# Altium PCB Webbie-V3.3.PcbDoc (part 1 of 3)
Units mil, origin at the board's own origin, x right, y up, seen from the top; angles counter-clockwise.
Board outline 3937.01 x 1574.8 mil, 4 copper layers (Top Layer, GND, GND-POWER, Bottom Layer), stack 61.865 mil thick; 129 components, 99 nets, 520 pads, 260 vias.
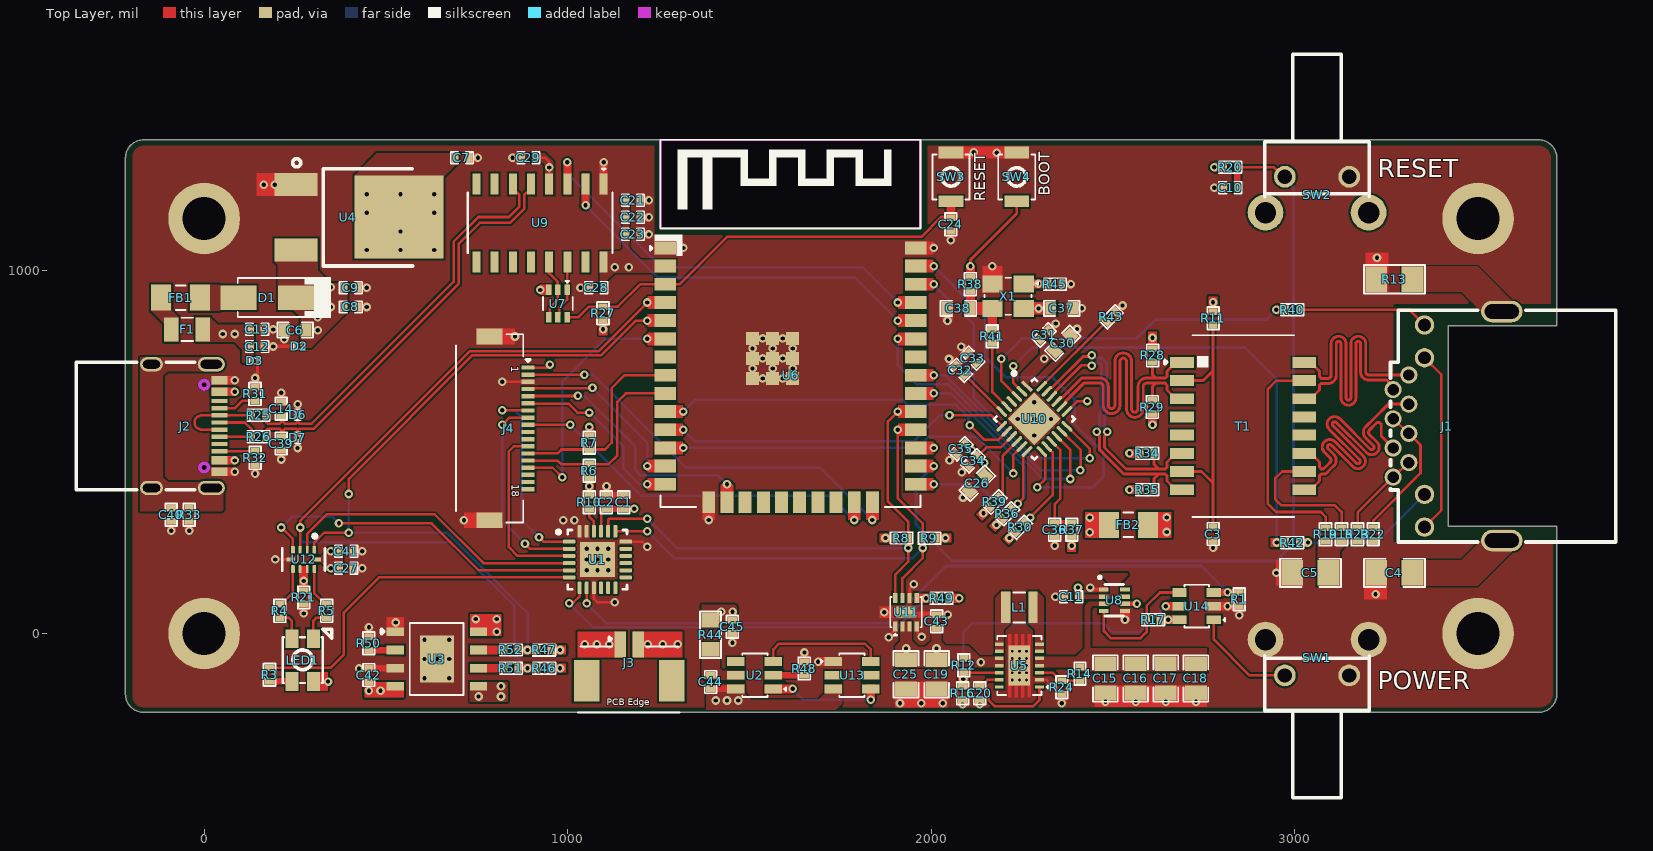
[diagram p0: Top Layer view]
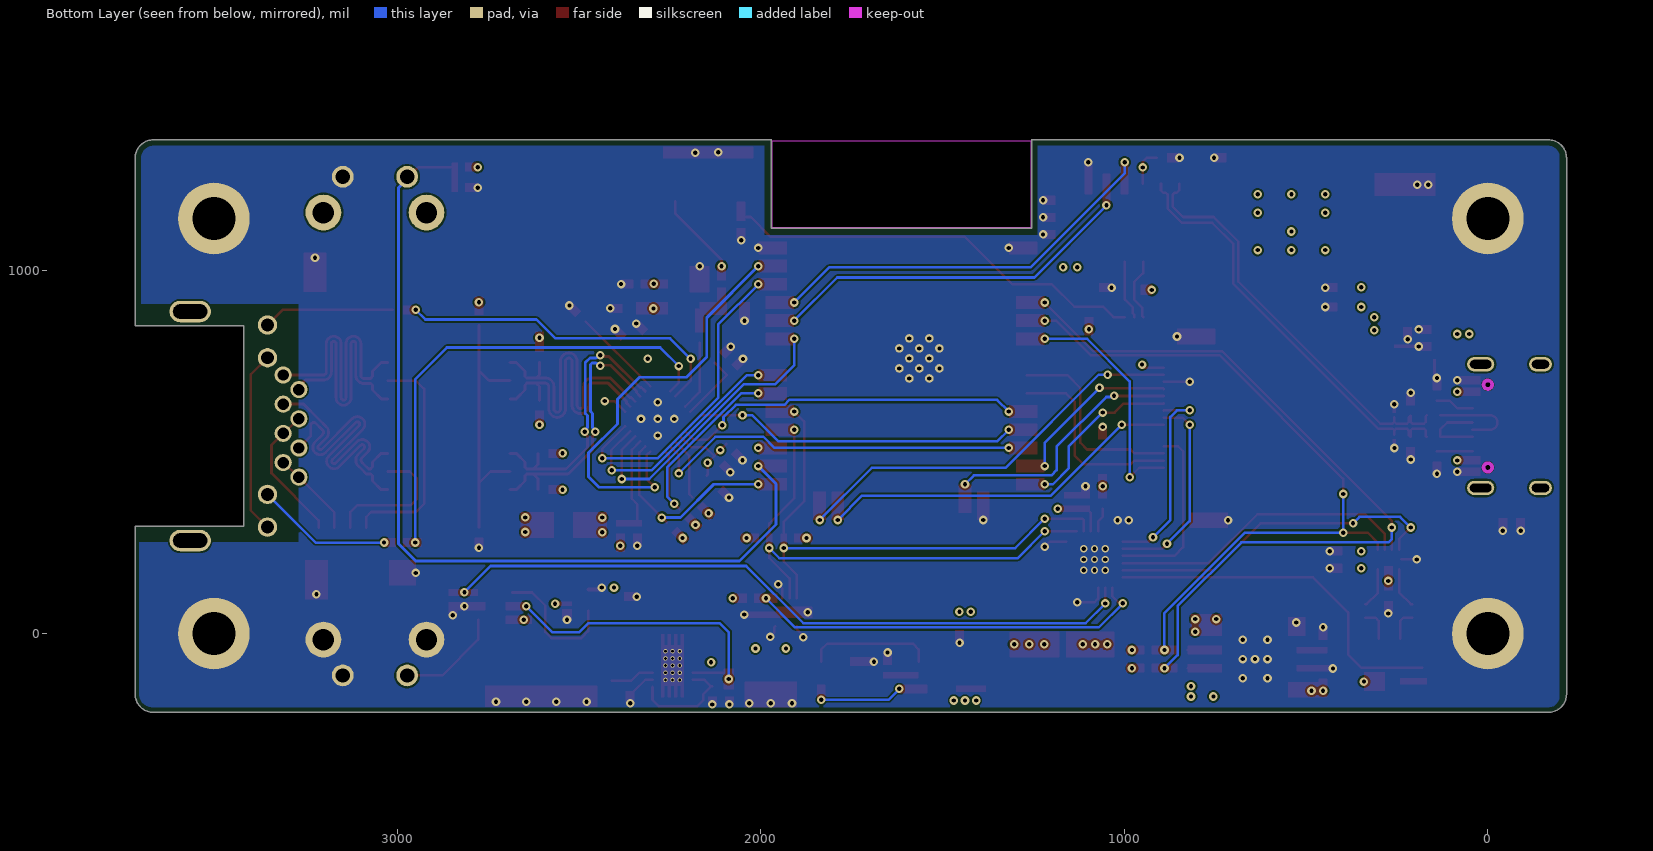
[diagram p1: Bottom Layer view, seen from below]
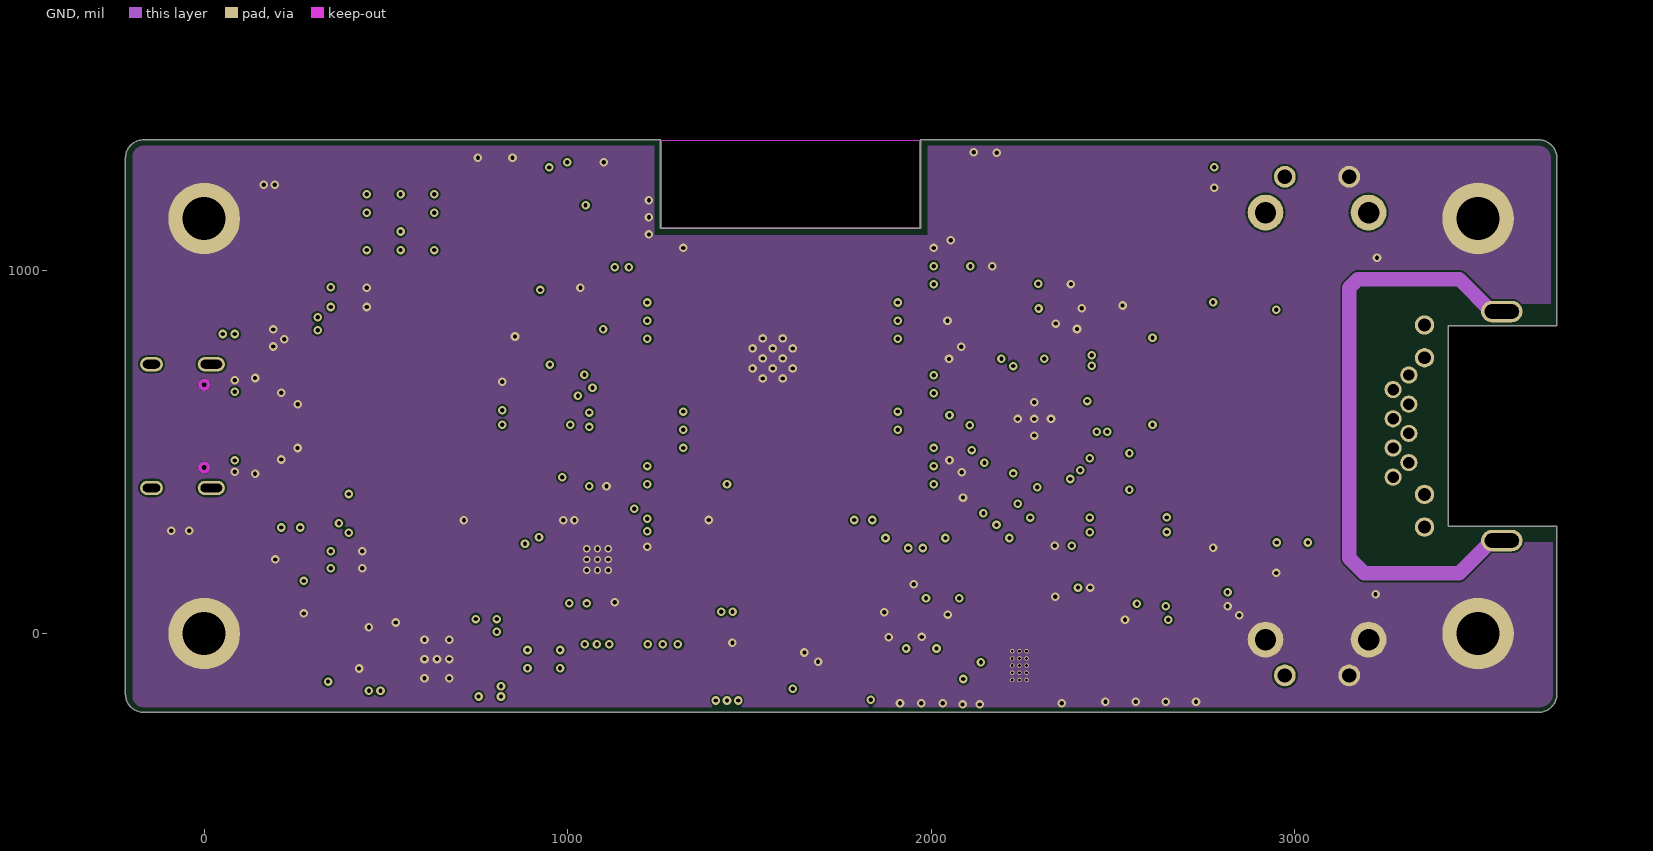
[diagram p2: GND]
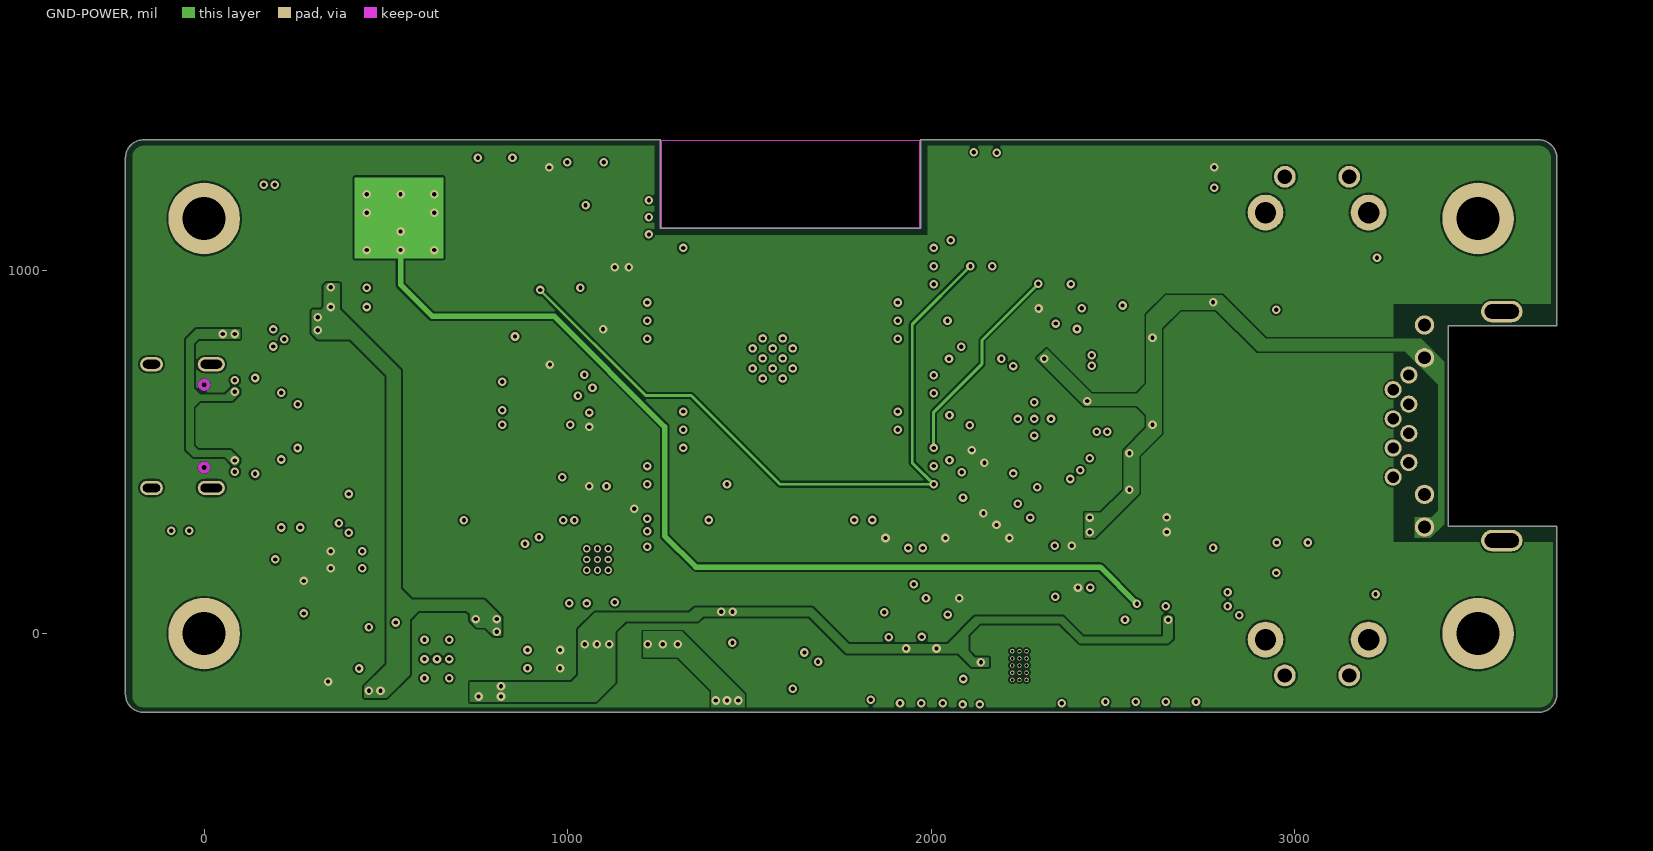
[diagram p3: GND-POWER]
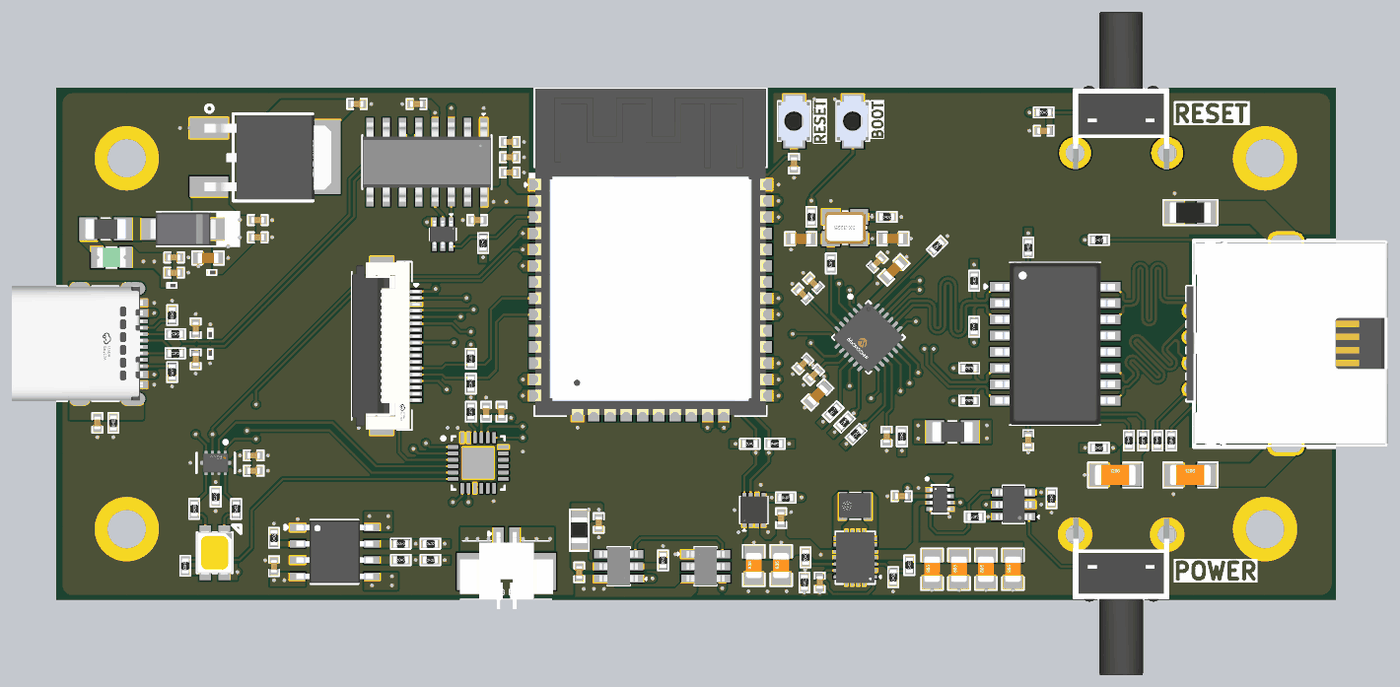
[diagram p5: 3D render of the assembled board from above, using the file's embedded part models]

## Layer stack, top to bottom
Top Solder: solder mask 0.787, Solder Resist, Dk 3.5
Top Layer: signal copper 1.378
Dielectric 2: prepreg 7.9921, PP-006, Dk 4.1
GND: signal copper 0.598
Dielectric 1: dielectric 41.9291, FR-4, Dk 4.8
GND-POWER: signal copper 0.598
Dielectric 3: prepreg 7.9921, PP-006, Dk 4.1
Bottom Layer: signal copper 1.378
Bottom Solder: solder mask 0.787, Solder Resist, Dk 3.5

## Board outline
-166.39,-216.54 cw(c-166.39,-166.39) -216.53,-166.39 -216.53,1308.27 cw(c-166.53,1308.27) -166.53,1358.27 -123.85,1358.27 1254.67,1358.27 1254.71,1358.23 1254.71,1114.53 1970.72,1114.53 1970.72,1358.23 1970.76,1358.27 3670.46,1358.27 cw(c3670.46,1308.27) 3720.46,1308.27 3720.46,1283.46 3720.47,847.15 3719.77,846.45 3421.74,846.45 3421.74,295.27 3719.77,295.27 3720.47,294.57 3720.47,-166.57 cw(c3670.51,-166.57) 3670.51,-216.53

## Design rules (kind name [scope] priority, off if disabled: settings)
Clearance [All] p1: gap=5 ignorepadtopadclearanceinfootprint=TRUE except(0: Arc-Text Track-Text SMDPad-Text THPad-Text Via-Text Fill-Text Poly-Text Region-Text Text-Text Text-Hole; 7: Arc-Hole Track-Hole Via-Hole)
DiffPairsRouting [All] p1: maxlimit=10 minlimit=6 mostfreqgap=10 toplayer_maxgap=6 toplayer_prefgap=6 toplayer_minwidth=8 toplayer_maxwidth=8 toplayer_prefwidth=8 midlayer1_mingap=10 midlayer1_minwidth=15 midlayer1_maxwidth=15 midlayer1_prefwidth=15 midlayer2_mingap=10 midlayer2_minwidth=15 midlayer2_maxwidth=15 midlayer2_prefwidth=15 bottomlayer_maxgap=6 bottomlayer_prefgap=6 bottomlayer_minwidth=8 bottomlayer_maxwidth=8 bottomlayer_prefwidth=8 maxuncoupledlength=500
HoleSize [All] p1: absolutevalues=TRUE maxlimit=500 minlimit=1 maxpercent=80.000 minpercent=20.000
HoleToHoleClearance [All] p1: gap=7 allowstackedmicrovias=TRUE
MatchedLengths Ethernet_Mag_RJ45 [InNetClass('Ethernet_Mag')] p1: tolerance=20 checknetsindiffpair=FALSE checkdiffpairvsdiffpair=TRUE checkxsignals=TRUE checkothers=TRUE
MatchedLengths USB_90 [InNetClass('USB 90 OHM')] p2: tolerance=50 checknetsindiffpair=FALSE checkdiffpairvsdiffpair=TRUE checkxsignals=TRUE checkothers=TRUE
MatchedLengths Ethernet [InNetClass('Ethernet')] p3: tolerance=20 checknetsindiffpair=FALSE checkdiffpairvsdiffpair=TRUE checkxsignals=TRUE checkothers=TRUE
MaxMinImpedance "Schematic Impedance Constraint_2" [InNetClass('Ethernet_Mag')] p1: minimum=97.00 maximum=105.0
MaxMinImpedance "Schematic Impedance Constraint_1" [InNetClass('USB 90 OHM')] p2: minimum=85.00 maximum=95.00
MaxMinImpedance "Schematic Impedance Constraint" [InNetClass('Ethernet')] p3: minimum=97.00 maximum=105.0
MinimumSolderMaskSliver [All] p1: minsoldermaskwidth=0
PlaneClearance [All] p1: clearance=10
PlaneConnect [All] p1: planeconnectstyle=Direct reliefexpansion=20 reliefentries=4 reliefconductorwidth=10 reliefairgap=10
PolygonConnect [All] p1: connectstyle=Direct reliefconductorwidth=10 reliefentries=4 polygonreliefangle="90 Angle" airgapwidth=10
RoutingVias [All] p1: holewidth=11.81 width=23.62 viastyle="Through Hole" minholewidth=11.81 minwidth=23.62 maxholewidth=11.81 maxwidth=23.62
SilkToSilkClearance [All] p1: silktosilkclearance=0
SilkToSolderMaskClearance [IsPad] p1: minsilkscreentomaskgap=0 clearancetoexposedcopper=TRUE
SolderMaskExpansion [All] p1: expansion=4 istentingtop=FALSE
SupplyNets "Schematic Supply Nets_12" [InNet('+3V3_USB')] p1: voltage=0.000
SupplyNets "Schematic Supply Nets_11" [InNet('3.3V_ESP')] p2: voltage=0.000
SupplyNets "Schematic Supply Nets_10" [InNet('+3V3_BATT')] p3: voltage=0.000
SupplyNets "Schematic Supply Nets_6" [InNet('+5V_OUT')] p4: voltage=0.000
SupplyNets "Schematic Supply Nets_5" [InNet('AVDD')] p5: voltage=0.000
SupplyNets "Schematic Supply Nets_4" [InNet('B-')] p6: voltage=0.000
SupplyNets "Schematic Supply Nets_3" [InNet('OUT/BATT+')] p7: voltage=0.000
SupplyNets "Schematic Supply Nets_2" [InNet('GND')] p8: voltage=0.000
SupplyNets "Schematic Supply Nets_1" [InNet('VUSB')] p9: voltage=0.000
UnRoutedNet [All] p1: checkbadconnections=TRUE
Width [All] p1: maxlimit=50 minlimit=5 preferedwidth=7
21 further rules are at their usual default settings.

## Classes and differential pairs
differential pair class Ethernet_Mag_RJ45: MRX MTX
net class Ethernet_Mag: MRX_N MRX_P MTX_N MTX_P
component class U_USB_Sheet: C6 C12 C13 C14 C39 C40 D1 D2 D3 F1 FB1 J2 R25 R26 R31 R32 R33
component class U_Power_Sheet: C7 C8 C9 C11 C15 C16 C17 C18 C19 C20 C25 C27 C41 L1 LED1 R1 R3 R4 R5 R12 R14 R16 R17 R21 R24 SW1 U4 U5 U8 U12 U14
component class U_FuelGauge_Sheet: C43 R49 U11
component class U_Ethernet_Sheet: C3 C4 C5 C26 C30 C31 C32 C33 C34 C35 C36 C37 C38 FB2 J1 R11 R13 R15 R19 R22 R23 R28 R29 R34 R35 R36 R37 R38 R39 R40 R41 R42 R43 R45 T1 U10 X1
component class U_Display_Sheet: J4
component class U_Controller_Sheet: C1 C2 C10 C21 C22 C23 C24 C28 C29 D6 D7 R6 R7 R8 R9 R10 R20 R27 R30 SW2 SW3 SW4 U1 U6 U7 U9
component class U_BattCharging_Sheet: C42 C44 C45 J3 R44 R46 R47 R48 R50 R51 R52 U2 U3 U13
differential pair class Ethernet_Lines: RX TX
net class Ethernet: RX_N RX_P TX_N TX_P
differential pair class USB_Lines: USB
net class "USB 90 OHM": USB_N USB_P
differential pair MTX: +MTX_P -MTX_N
differential pair MRX: +MRX_P -MRX_N
differential pair USB: +USB_P -USB_N
differential pair TX: +TX_P -TX_N
differential pair RX: +RX_P -RX_N

## Components (designator, comment, footprint, x,y, rotation, side; value= is the part's Value field where it differs from the comment)
C1 "10nF" Cap-0402 1153.54,361.59 r90 top
C2 "100nF" cap-0402 1106.53,361.6 r90 top
C3 "4.7nF" Cap-0402 2775,274 r90 top
C4 "4.7nF" Cap-1206 3274,166.9 r0 top
C5 "1000pF" Cap-1206 3042.96,166.9 r0 top
C6 "10uF" Cap-0603 250.4,834.8 r0 top
C7 "1uF" Cap-0402 709,1309 r180 top
C8 "1uF" Cap-0402 403.62,898.46 r180 top
C9 "100nF" cap-0402 403.61,951.72 r0 top
C10 "100nF" cap-0402 2822.56,1226.69 r180 top
C11 "1uF" Cap-0402 2385.2,101.66 r0 top
C12 "10nF" Cap-0402 145.98,789.69 r0 top
C13 "10nF" Cap-0402 145.98,836.7 r0 top
C14 "47pF" Cap-0402 212.21,618.39 r270 top
C15 "22uF" Cap-0805 2479.01,-123.39 r90 top
C16 "22uF" Cap-0805 2562.02,-123.39 r90 top
C17 "22uF" Cap-0805 2645.03,-123.39 r90 top
C18 "22uF" Cap-0805 2728.04,-123.39 r90 top
C19 "22uF" Cap-0805 2014.44,-112 r90 top locked
C20 "100nF" cap-0402 2132.99,-163.83 r270 top
C21 "10nF" Cap-0402 1179.36,1192.02 r180 top
C22 "100nF" cap-0402 1179.36,1145.01 r180 top
C23 "100nF" cap-0402 1179.36,1098 r180 top
C24 "100nF" cap-0402 2053.83,1125.61 r270 top
C25 "22uF" Cap-0805 1930.41,-112 r90 top
C26 "10uF" Cap-0603 2126.71,413.66 r45 top
C27 "1uF" Cap-0402 390.89,179.81 r180 top
C28 "10nF" Cap-0402 1078.77,951.72 r180 top
C29 "100nF" cap-0402 892,1309 r180 top
C30 "10uF" Cap-0603 2361.37,798.61 r225 top
C31 "100nF" cap-0402 2310.71,821.5 r45 top
C32 "1uF" Cap-0402 2079.92,724.28 r315 top
C33 "4.7nF" Cap-0402 2113.73,757.88 r135 top
C34 "100nF" cap-0402 2114.72,475.23 r225 top
C35 "100nF" cap-0402 2081.47,508.46 r225 top
C36 "100nF" cap-0402 2339.2,285.46 r90 top
C37 "10uF" Cap-0603 2358.66,894.6 r180 top
C38 "15pF" Cap-0603 2074.67,894.35 r0 top
C39 "47pF" Cap-0402 212.21,522.87 r90 top
C40 "4.7nF" Cap-0402 -90.41,326.99 r90 top
C41 "100nF" cap-0402 390.89,226.82 r180 top
C42 "100nF" cap-0402 453.21,-113.85 r90 top
C43 "100nF" cap-0402 2014.44,33.86 r90 top locked
C44 "100nF" cap-0402 1393,-133 r270 top
C45 "10uF" Cap-0402 1453.01,18.83 r90 top
D1 "SS34" SMA 173.48,924.29 r180 top
D2 "PESD5V0H1BSFYL" DSN0603-2 261.5,790.53 r0 top
D3 "PESD5V0H1BSFYL" DSN0603-2 138.99,750.08 r0 top
D6 "PESD5V0H1BSFYL" DSN0603-2 257,602.39 r270 top
D7 "PESD5V0H1BSFYL" DSN0603-2 257,538.87 r90 top
F1 "BSMD0805L-300" Fuse-0805 -47,836.7 r180 top
FB1 "100MHz" IND-1206 -65,924 r0 top
FB2 "100MHz" IND-1206 2541.93,299.34 r0 top
J1 "KH-RCHSP32-8P8C-D" KH-RCHSP32-8P8C-D 3569.37,885.83 r270 top locked
J2 "GT-USB-7004B" GT-USB-7004B 19.69,740.94 r270 top locked
J3 "1.25-2PWB" 1.25-2PWB 1169.13,-79.8 r0 top locked
J4 "F0502-B-18-15T-R" F0502-B-18-15T-R 837.88,564.55 r270 top locked
L1 "1uH" "IND-1008 (2520 Metric)" 2242.49,72 r0 top
LED1 "S4-3528RGBTA-A" SMD3528-4P 241.47,-131.84 r90 top locked
R1 "10K" Res-0402 2846.93,94.64 r270 top
R3 "75R" Res-0402 180,-113 r270 top
R4 "75R" Res-0402 208.14,62.46 r90 top
R5 "75R" Res-0402 336.71,62.46 r90 top
R6 "10K" Res-0402 1059.52,447.89 r270 top
R7 "10K" Res-0402 1059.52,524.9 r90 top
R8 "10K" Res-0402 1917.99,263 r180 top
R9 "10K" Res-0402 1995,263 r0 top
R10 "10K" Res-0402 1059.52,361.59 r90 top
R11 "0R" Res-0402 2775,867.14 r90 top
R12 "0R" Res-0402 2089.72,-86.82 r270 top
R13 "1M" Res-1206 3274,974.83 r0 top
R14 "768k" Res-0402 2409.01,-110.7 r90 top
R15 "75R" Res-0402 3128.6,273.2 r270 top
R16 "100K" Res-0402 2085.98,-163.83 r90 top
R17 "100K" Res-0402 2610.52,38.24 r180 top
R19 "75R" Res-0402 3084.53,272.86 r270 top
R20 "10K" Res-0402 2822.57,1283 r180 top
R21 "10K" Res-0402 273.74,99.46 r270 top
R22 "75R" Res-0402 3215.73,273.2 r270 top
R23 "75R" Res-0402 3172.67,272.86 r270 top
R24 "137k" Res-0402 2359.18,-147.74 r90 top
R25 "27R" Res-0402 149.48,600.39 r180 top
R26 "27R" Res-0402 149.48,541.27 r180 top
R27 "10K" Res-0402 1097.14,880.97 r270 top
R28 "49.9R" Res-0402 2608.54,765 r90 top
R29 "49.9R" Res-0402 2608.34,623.15 r270 top
R30 "10K" Res-0402 2244.92,292.33 r225 top
R31 "5.1K" Res-0402 139.98,659.29 r270 top
R32 "5.1K" Res-0402 139.98,483.26 r90 top
R33 "1M" Res-0402 -41.4,327 r90 top
R34 "49.9R" Res-0402 2593.54,495.87 r180 top
R35 "49.9R" Res-0402 2593.54,395.87 r180 top
R36 "1.5K" Res-0402 2209.52,329.7 r225 top
R37 "10K" Res-0402 2386.21,285.46 r270 top
R38 "33R" Res-0402 2107.67,961.36 r90 top
R39 "10K" Res-0402 2174.76,362.05 r225 top
R40 "470R" Res-0402 2993,890.64 r0 top
R41 "33R" Res-0402 2167.73,818.15 r270 top
R42 "470R" Res-0402 2993,250.55 r0 top
R43 "12.1k" Res-0402 2494.85,871.27 r225 top
R44 "100R" RES-0805 1393.01,-3.17 r90 top
R45 "10K" Res-0402 2340.16,961.53 r0 top
R46 "10K" Res-0402 934.93,-95.04 r0 top
R47 "10K" Res-0402 934.93,-45.05 r0 top
R48 "1K" Res-0402 1651.07,-95.97 r270 top
R49 "10K" Res-0402 2028.25,97.28 r0 top locked
R50 "1.2K" Res-0402 453.22,-26.62 r90 top
R51 "0R" Res-0402 843.92,-95.04 r180 top
R52 "0R" Res-0402 843.92,-45.04 r180 top
SW1 "TC-6615-9.5-260G" TC-6615-9.5-260G 3149.61,-114.96 r180 top locked
SW2 "TC-6615-9.5-260G" TC-6615-9.5-260G 2972.44,1256.69 r0 top locked
SW3 "B3U-1000P" B3U-1000P 2054.33,1256.19 r270 top locked
SW4 "B3U-1000P" B3U-1000P 2235,1256.19 r270 top locked
T1 "H1102NL" H1102NLT 2857.96,570.87 r0 top locked value=350uH
U1 "TCA9555RTWR" WQFN-24-EP(4x4) 1081.79,203.76 r0 top locked
U2 "DW01-A/J" SOT-23-6 1514.1,-114.5 r180 top locked
U3 "TP4056-42-ESOP8" ESOP-8 640.28,-70.04 r0 top locked
U4 "UZ1085L-33-TN3-R" TO-252-2(DPAK) 253,1235 r0 top
U5 "TPS63020DSJR" "14-VSON (4x3)" 2242.49,-87.82 r180 top
U6 "ESP32-WROOM-32E-N4" "38-SMD Module" 1612.8,711.22 r0 top locked
U7 "UMH3N" SC-70-6_ 973,908 r270 top
U8 "LM66200DRLR" SOT8 2503.61,91.82 r270 top locked
U9 "CH340C" SOP-16 924,1129.99 r270 top
U10 "LAN8720A-CP-TR" LAN8720A-CP-TR 2283.46,590.55 r315 top locked
U11 "MAX17048G+T10" "8-TDFN-EP (2x2)" 1930.47,59.02 r90 top
U12 "TS3A24157RSER" UQFN-10(1.5x2) 273.74,204 r270 top locked
U13 "8205A" SOT-23-6 1782,-114.5 r0 top locked
U14 "MAX16054AZT+T" TSOT-23-6 2730.11,75.64 r180 top locked
X1 "50MHz" OT2EL4C4JI-111OLP-50M 2211.05,928.07 r180 top

## Footprints (in the part's own frame and the unit in brackets; to place one, negate y for a bottom-side part, rotate by r counter-clockwise, add the part's x,y. Pads: shape width x height; smd on the part's side, far side on the other; paste and mask are expansions set on the pad)
1.25-2PWB [mm]
  rect 0.8x1.8 smd: 1(-0.625,1.275) 2(0.625,1.275)
  rect 1.8x2.9 smd: MP1(-2.975,-1.275) MP2(2.975,-1.275)
  silkscreen extent -3.6,-3.48 3.52,1.78, body extent -3.62,-4.24 3.62,1.81, height 3.5
"8-TDFN-EP (2x2)" [mm]
  rect 0.7x0.3 smd: 1(-0.99,0.75) 2(-0.99,0.25) 3(-0.99,-0.25) 4(-0.99,-0.75) 5(0.99,-0.75) 6(0.99,-0.25) 7(0.99,0.25) 8(0.99,0.75)
  rect 0.8x1.38 smd: 9(0,0)
  silkscreen extent -1.63,-1.1 1.05,1.1, body extent -1.05,-1.05 1.05,1.05, height 0.81
"14-VSON (4x3)" [mm]
  rect 0.6x0.24 smd: 1(-1.4,1.5) 2(-1.4,1) 3(-1.4,0.5) 4(-1.4,0) 5(-1.4,-0.5) 6(-1.4,-1) 7(-1.4,-1.5) 8(1.4,-1.5) 9(1.4,-1) 10(1.4,-0.5) 11(1.4,0) 12(1.4,0.5) 13(1.4,1) 14(1.4,1.5)
  round 0.3 hole 0.2: 15(-0.5,0.5) 15(-0.5,1) 15(-0.5,0) 15(-0.5,-1) 15(-0.5,-0.5) 15(0,1) 15(0,0.5) 15(0,0) 15(0,-0.5) 15(0,-1) 15(0.5,0.5) 15(0.5,1) 15(0.5,0) 15(0.5,-1) 15(0.5,-0.5)
  rect 1.5x2.8 smd: 15(0,0)
  Top Layer region: 0.79,-2.2 0.59,-2.2 0.59,-1.425 0.33,-1.425 0.33,-2.2 0.13,-2.2 0.13,-1.425 -0.13,-1.425 -0.13,-2.2 -0.33,-2.2 -0.33,-1.425 -0.59,-1.425 -0.59,-2.2 -0.79,-2.2 -0.79,2.2 -0.59,2.2 -0.59,1.425 -0.33,1.425 -0.33,2.2 -0.13,2.2 -0.13,1.425 0.13,1.425 0.13,2.2 0.33,2.2 0.33,1.425 0.59,1.425 0.59,2.2 0.79,2.2
  silkscreen extent -2.01,-2.06 1.55,2.06, body extent -1.5,-2 1.5,2, height 1
"38-SMD Module" [mm]
  rect 1.5x0.9 smd: 1(-8.75,8.88) 2(-8.75,7.61) 3(-8.75,6.34) 4(-8.75,5.07) 5(-8.75,3.8) 6(-8.75,2.53) 7(-8.75,1.26) 8(-8.75,-0.01) 9(-8.75,-1.28) 10(-8.75,-2.55) 11(-8.75,-3.82) 12(-8.75,-5.09) 13(-8.75,-6.36) 14(-8.75,-7.63) 25(8.75,-7.63) 26(8.75,-6.36) 27(8.75,-5.09) 28(8.75,-3.82) 29(8.75,-2.55) 30(8.75,-1.28) 31(8.75,-0.01) 32(8.75,1.26) 33(8.75,2.53) 34(8.75,3.8) 35(8.75,5.07) 36(8.75,6.34) 37(8.75,7.61) 38(8.75,8.88)
  rect 0.9x1.5 smd: 15(-5.71,-8.88) 16(-4.44,-8.88) 17(-3.17,-8.88) 18(-1.9,-8.88) 19(-0.63,-8.88) 20(0.64,-8.88) 21(1.91,-8.88) 22(3.18,-8.88) 23(4.45,-8.88) 24(5.72,-8.88)
  rect 0.9x0.9 smd: 39(-2.65,2.56) 40(-1.25,2.56) 41(0.15,2.56) 42(-2.65,1.16) 43(-1.25,1.16) 44(0.15,1.16) 45(-2.65,-0.24) 46(-1.25,-0.24) 47(0.15,-0.24)
  round 0.6 hole 0.3 mask+0: 39_10(-1.95,2.56) 39_11(-0.55,2.56) 39_12(-2.65,1.86) 39_13(-1.25,1.86) 39_14(0.15,1.86) 39_15(-1.95,1.16) 39_16(-0.55,1.16) 39_17(-2.65,0.46) 39_18(-1.25,0.46) 39_19(0.15,0.46) 39_20(-1.95,-0.24) 39_21(-0.55,-0.24)
  Keep-Out Layer region: -9.044,10.287 9.041,10.287 9.041,16.383 -9.044,16.383
  silkscreen extent -9.8,-9.22 9.09,16.43, body extent -9,-9.12 9,16.38, height 3.25
B3U-1000P [mm] "SWITCH TACTILE SPST-NO 0.05A 12V"
  rect 0.82x1.72 smd: 1(-1.7,0) 2(1.7,0)
  silkscreen extent -1.57,-1.3 1.57,1.3, body extent -2,-1.26 2,1.24, height 1.6
Cap-0402 [mil]
  rect 18x25 smd mask+2.36: 1(-18.5,0) 2(18.5,0)
  silkscreen extent -31,-16 31,16, body extent -20,-10 20,10, height 19
cap-0402 [mil]
  rect 18x25 smd mask+2.36: 1(-18.5,0) 2(18.5,0)
  silkscreen extent -31,-16 31,16, body extent -20,-10 20,10, height 19
Cap-0603 [mil]
  rect 30x35 smd mask+2.36: 1(-30,0) 2(30,0)
  silkscreen extent -49,-21 49,21, body extent -32,-16 31,16, height 34
Cap-0805 [mil] "SMD 0805"
  rect 40x60 smd mask+2.76: 1(-40,0) 2(40,0)
  silkscreen extent -64,-34 64,34, body extent -39,-25 39,25, height 30
Cap-1206 [mil] "SMD 1206"
  rect 60x70 smd: 1(-50,0) 2(50,0)
  silkscreen extent -84,-39 84,39, body extent -63,-31 63,32, height 39
DSN0603-2 [mm]
  rect 0.2x0.24 smd mask+0.055: 1(-0.2,0) 2(0.2,0)
  silkscreen extent -0.38,-0.2 0.38,0.2, body extent -0.3,-0.15 0.3,0.15, height 0.32
ESOP-8 [mm]
  rect 1.2x0.6 smd: 1(-2.909,1.905) 2(-2.909,0.635) 3(-2.909,-0.635) 4(-2.909,-1.905) 5(2.909,-1.905) 6(2.909,-0.635) 7(2.909,0.635) 8(2.909,1.905)
  rect 2.4x3.3 smd: 9(0,0)
  silkscreen extent -3.88,-2.51 1.85,2.51, body extent -3,-2.45 3,2.45, height 1.75
F0502-B-18-15T-R [mm]
  rect 0.3x0.92 smd: 1(-4.25,1.35) 2(-3.75,1.35) 3(-3.25,1.35) 4(-2.75,1.35) 5(-2.25,1.35) 6(-1.75,1.35) 7(-1.25,1.35) 8(-0.75,1.35) 9(-0.25,1.35) 10(0.25,1.35) 11(0.75,1.35) 12(1.25,1.35) 13(1.75,1.35) 14(2.25,1.35) 15(2.75,1.35) 16(3.25,1.35) 17(3.75,1.35) 18(4.25,1.35)
  rect 1.1x1.8 smd: MP1(-6.42,-1.35) MP2(6.42,-1.35)
  silkscreen extent -6.58,-3.68 6.58,1.5, body extent -6.55,-3.66 6.55,1.69, height 2.03
Fuse-0805 [mm]
  rect 1x1.7 smd: 1(-1.1,0) 2(1.1,0)
  silkscreen extent -0.41,-0.81 0.41,0.81, body extent -1.1,-0.75 1.1,0.75, height 1.24
GT-USB-7004B [mm]
  oval 1x1.9 hole 0.6 slot 1.5 at 90 deg paste-2539.97 mask+0.05: 1(0,0) 2(8.64,0)
  oval 1x1.6 hole 0.6 slot 1.2 at 90 deg paste-2539.97 mask+0.05: 3(8.64,-4.18) 4(0,-4.18)
  rect 0.6x1.14 smd paste-100 mask+0.05: A1B12(1.12,0.57) A4B9(1.92,0.57) B1A12(7.52,0.57) B4A9(6.72,0.57)
  rect 0.3x1.14 smd paste-100 mask+0.05: A5(3.07,0.57) A6(4.07,0.57) A7(4.57,0.57) A8(5.57,0.57) B5(6.07,0.57) B6(5.07,0.57) B7(3.57,0.57) B8(2.57,0.57)
  Keep-Out Layer board cut-out: 7.51,-0.5 7.469,-0.351 7.36,-0.242 7.21,-0.202 7.061,-0.242 6.951,-0.351 6.91,-0.5 6.91,-0.5 6.951,-0.649 7.061,-0.758 7.21,-0.798 7.36,-0.758 7.469,-0.649 7.51,-0.5
  Keep-Out Layer board cut-out: 1.73,-0.5 1.689,-0.351 1.58,-0.242 1.43,-0.202 1.281,-0.242 1.171,-0.351 1.13,-0.5 1.13,-0.5 1.171,-0.649 1.281,-0.758 1.43,-0.798 1.58,-0.758 1.689,-0.649 1.73,-0.5
  Keep-Out Layer circle w0.254: c7.21,-0.5 r0.3
  Keep-Out Layer circle w0.005: c7.21,-0.5 r0.3
  Keep-Out Layer circle w0.254: c1.43,-0.5 r0.3
  Keep-Out Layer circle w0.005: c1.43,-0.5 r0.3
  silkscreen extent -0.13,-9.43 8.77,-1.17, body extent -0.16,-9.46 8.78,0.79, height 3.28
H1102NLT [mm]
  rect 1.67x0.76 smd: 1(-4.265,4.445) 2(-4.265,3.175) 3(-4.265,1.905) 4(-4.265,0.635) 5(-4.265,-0.635) 6(-4.265,-1.905) 7(-4.265,-3.175) 8(-4.265,-4.445) 9(4.265,-4.445) 10(4.265,-3.175) 11(4.265,-1.905) 12(4.265,-0.635) 13(4.265,0.635) 14(4.265,1.905) 15(4.265,3.175) 16(4.265,4.445)
  silkscreen extent -5.48,-6.35 3.55,6.35, body extent -4.7,-6.35 4.7,6.35, height 5.97
"IND-1008 (2520 Metric)" [mm]
  rect 0.65x2.2 smd: 1(-0.95,0) 2(0.95,0)
  silkscreen extent -0.41,-1.04 0.41,1.04, body extent -1.25,-1 1.25,1, height 1.2
IND-1206 [mm]
  rect 1.4x1.82 smd: 1(-1.36,0) 2(1.36,0)
  silkscreen extent -0.34,-0.85 0.34,0.85, body extent -1.6,-0.8 1.6,0.8, height 1.3
KH-RCHSP32-8P8C-D [mm]
  round 1.2 hole 0.8 paste-2539.97 mask+0.05: 1(4.43,-6.5) 2(5.45,-7.6) 3(6.47,-6.5) 4(7.49,-7.6) 5(8.51,-6.5) 6(9.53,-7.6) 7(10.55,-6.5) 8(11.57,-7.6)
  round 1.35 hole 0.9 paste-2539.97 mask+0.05: 9(0.94,-5.4) 10(3.23,-5.4) 11(12.77,-5.4) 12(15.06,-5.4)
  oval 1.5x2.9 hole 1 slot 2.4 at 90 deg paste-2539.97 mask+0.05: 13(16,0) 14(0,0)
  silkscreen extent -0.1,-7.78 16.1,7.95, body extent -0.13,-7.81 16.07,7.94, height 8.52
LAN8720A-CP-TR [mm]
  rect 0.961x0.239 smd paste+0 mask+0: 1(-1.976,1.25)
  rrect100% 0.961x0.239 smd paste+0 mask+0: 2(-1.976,0.75) 3(-1.976,0.25) 4(-1.976,-0.25) 5(-1.976,-0.75) 6(-1.976,-1.25) 13(1.976,-1.25) 14(1.976,-0.75) 15(1.976,-0.25) 16(1.976,0.25) 17(1.976,0.75) 18(1.976,1.25)
  rrect100% 0.239x0.961 smd paste+0 mask+0: 7(-1.25,-1.976) 8(-0.75,-1.976) 9(-0.25,-1.976) 10(0.25,-1.976) 11(0.75,-1.976) 12(1.25,-1.976) 19(1.25,1.976) 20(0.75,1.976) 21(0.25,1.976) 22(-0.25,1.976) 23(-0.75,1.976) 24(-1.25,1.976)
  rect 2.6x2.6 smd paste-1000 mask+0: 25(0,0)
  silkscreen extent -3.38,-2 2,2, body extent -2.96,-2.96 2.96,2.96, height 0.25
OT2EL4C4JI-111OLP-50M [mm]
  rect 1.4x1.2 smd: 1(-1.1,-0.85) 2(1.1,-0.85) 3(1.1,0.85) 4(-1.1,0.85)
  silkscreen extent -2.11,-1.3 1.65,1.3, body extent -1.6,-1.25 1.6,1.25, height 0.81
Res-0402 [mil]
  rect 18x25 smd mask+2.17: 1(-18.5,0) 2(18.5,0)
  silkscreen extent -32,-17 32,16, body extent -23,-11 23,11, height 16
RES-0805 [mil] "SMD 0805"
  rect 40x50 smd: 1(-40,0) 2(40,0)
  silkscreen extent -64,-29 64,29, body extent -39,-25 39,24, height 24
Res-1206 [mil]
  rect 60x70 smd: 1(-50,0) 2(50,0)
  silkscreen extent -84,-39 84,39, body extent -63,-31 63,31, height 24
SC-70-6_ [mm]
  rect 0.73x0.38 smd: 1(-0.95,0.65) 2(-0.95,0) 3(-0.95,-0.65) 4(0.95,-0.65) 5(0.95,0) 6(0.95,0.65)
  silkscreen extent -1.57,-1.04 0.46,1.04, body extent -1.05,-1 1.05,1, height 0.92
SMA [mm]
  rect 2.5x1.7 smd: 1(-2,0) 2(2,0)
  silkscreen extent -4.45,-1.42 2.06,1.42, body extent -2.6,-1.3 2.6,1.3, height 2.4
SMD3528-4P [mm]
  rect 1.3x0.9 smd paste+0 mask+0.05: 1(0,0) 2(0,-1.5) 3(3,0) 4(3,-1.5)
  silkscreen extent -0.1,-2.78 3.66,0.65, body extent -0.25,-2.14 3.25,0.66, height 1.91
SOP-16 [mil]
  rect 57.55x22 smd: 1(-107.27,175) 2(-107.27,125) 3(-107.27,75) 4(-107.27,25) 5(-107.27,-25) 6(-107.27,-75) 7(-107.27,-125) 8(-107.27,-175) 9(107.27,-175) 10(107.27,-125) 11(107.27,-75) 12(107.27,-25) 13(107.27,25) 14(107.27,75) 15(107.27,125) 16(107.27,175)
  silkscreen extent -149,-199 84,199, body extent -122,-197 122,197, height 69
SOT8 [mm]
  rect 0.3x0.67 smd mask-2539.97: 1(-0.75,-0.74) 2(-0.25,-0.74) 3(0.25,-0.74) 4(0.75,-0.74) 5(0.75,0.74) 6(0.25,0.74) 7(-0.25,0.74) 8(-0.75,0.74)
  silkscreen extent -1.7,-1.12 1.1,0.65, body extent -1.05,-0.8 1.05,0.8, height 0.6
SOT-23-6 [mm]
  rect 1.22x0.62 smd: 1(-1.31,0.95) 2(-1.31,0) 3(-1.31,-0.95) 4(1.31,-0.95) 5(1.31,0) 6(1.31,0.95)
  silkscreen extent -2.18,-1.52 0.86,1.52, body extent -1.5,-1.5 1.5,1.5, height 1.47
TC-6615-9.5-260G [mm]
  round 1.524 hole 1: 1(0,0) 2(4.5,0)
  round 2.5 hole 1.5: 3(-1.35,-2.5) 4(5.85,-2.5)
  silkscreen extent -1.4,-1.38 5.9,8.55, body extent -1.93,-3.81 6.42,8.54, height 7.21
TO-252-2(DPAK) [mil]
  rect 118.1x63 smd: 1(0,0) 3(0,-180)
  rect 244.09x228.35 smd: 2(282.68,-89)
  silkscreen extent -10,-224 321,71, body extent -14,-221 377,39, height 91
TSOT-23-6 [mm]
  rect 1x0.6 smd: 1(-1.2,0.95) 2(-1.2,0) 3(-1.2,-0.95) 4(1.2,-0.95) 5(1.2,0) 6(1.2,0.95)
  silkscreen extent -1.98,-1.5 0.86,1.5, body extent -1.41,-1.45 1.41,1.45, height 1
UQFN-10(1.5x2) [mm]
  rrect40% 0.55x0.25 smd paste+0 mask+0: 1(-0.675,0.75) 4(-0.675,-0.75) 6(0.675,-0.75) 9(0.675,0.75)
  rrect50% 0.55x0.2 smd paste+0 mask+0: 2(-0.675,0.25) 3(-0.675,-0.25) 7(0.675,-0.25) 8(0.675,0.25)
  rrect33% 0.3x0.6 smd paste+0 mask+0: 5(0,-0.9) 10(0,0.9)
  silkscreen extent -1.75,-1.5 0.77,1.5, body extent -1.05,-1.3 1.05,1.3, height 0.25
WQFN-24-EP(4x4) [mm] "QFN, 24-Leads, Body 4x4mm, Pitch 0.5mm, Thermal Pad 2.45x2.45mm"
  rrect36% 0.85x0.28 smd: 1(-1.975,1.25) 2(-1.975,0.75) 3(-1.975,0.25) 4(-1.975,-0.25) 5(-1.975,-0.75) 6(-1.975,-1.25) 13(1.975,-1.25) 14(1.975,-0.75) 15(1.975,-0.25) 16(1.975,0.25) 17(1.975,0.75) 18(1.975,1.25)
  rrect36% 0.28x0.85 smd: 7(-1.25,-1.975) 8(-0.75,-1.975) 9(-0.25,-1.975) 10(0.25,-1.975) 11(0.75,-1.975) 12(1.25,-1.975) 19(1.25,1.975) 20(0.75,1.975) 21(0.25,1.975) 22(-0.25,1.975) 23(-0.75,1.975) 24(-1.25,1.975)
  rrect4% 2.45x2.45 smd: 25(0,0)
  silkscreen extent -2.85,-2.07 2.07,2.07, body extent -2,-2 2,2, height 0.8

## Part data
C1 C12 C13 C21 C28: library part CC0402KRX7R8BB103, "CAP CER 10000PF 25V X7R 0402", Case Code (Imperial)=0402, Case Code (Metric)=1005, Dielectric=X7R, LCSC Part Number=C327025, Manufacturer=Yageo, Max Operating Temperature=125°C, Min Operating Temperature=-55°C, Package Quantity=1, Supplier Part Number 1=311-1337-1-ND, Tolerance=10%, Voltage Rating=25V, Capacitance=10nF, Case/Package=0402, ComponentLink1Description=http://www.yageo.com/documents/recent/UPY-GPHC_X7R_6.3V-to-50V_18.pdf?src-supplier=Digi-Key, ComponentLink1URL=http://www.yageo.com/documents/recent/UPY-GPHC_X7R_6.3V-to-50V_18.pdf?src-supplier=Digi-Key, ComponentLink2Description=https://www.verical.com/server-webapp/html/getDatasheet?partID=375418&src-supplier=Verical, ComponentLink2URL=https://www.verical.com/server-webapp/html/getDatasheet?partID=375418&src-supplier=Verical, ComponentLink3Description=http://www.yageo.com/documents/recent/UPY-GPHC_X7R_6.3V-to-50V_8.pdf?src-supplier=Avnet, ComponentLink3URL=http://www.yageo.com/documents/recent/UPY-GPHC_X7R_6.3V-to-50V_8.pdf?src-supplier=Avnet, ComponentLink4Description=https://4donline.ihs.com/images/VipMasterIC/IC/YAGO/YAGO-S-A0003557223/YAGO-S-A0003557223-1.pdf?hkey=52A5661711E402568146F3353EA87419&src-supplier=Element14, ComponentLink4URL=https://4donline.ihs.com/images/VipMasterIC/IC/YAGO/YAGO-S-A0003557223/YAGO-S-A0003557223-1.pdf?hkey=52A5661711E402568146F3353EA87419&src-supplier=Element14, ComponentLink5Description=http://www.farnell.com/datasheets/2167236.pdf?src-supplier=Element14, ComponentLink5URL=http://www.farnell.com/datasheets/2167236.pdf?src-supplier=Element14, ComponentLink6Description=http://www.mouser.com/ds/2/447/Yageo_UPY-GP_NP0_16V-to-50V_9-358835.pdf?src-supplier=Mouser, ComponentLink6URL=http://www.mouser.com/ds/2/447/Yageo_UPY-GP_NP0_16V-to-50V_9-358835.pdf?src-supplier=Mouser, Composition=Ceramic, Depth=0.5mm, Halogen Free="Halogen Free", Height=0.5mm, Item Type=Capacitor, Lead Free="Lead Free", Length=1mm, Manufacturer Part Number=CC0402KRX7R8BB103, Mount="Surface Mount", Packaging="Tape and Reel", Pricing 1="1=0.1, 10=0.021, 100=0.0093, 500=0.00666, 1000=0.00523, 2500=0.00476, 5000=0.00438 (USD)", Radiation Hardening=No, REACH SVHC=Unknown, Stock 1=0, Supplier 1=Digi-Key, Termination=SMD/SMT, Thickness=0.022inch, Voltage Rating (DC)=25V, Width=0.02inch
C2 C9 C10 C20 C22 C23 C24 C29 C31 C34 C35 C36 C41 C42 C43 C44: library part C1005X7R1H104KT000F, "CAP CER 0.1UF 50V X7R 0402", Dielectric=X7R, LCSC Part Number=C361198, Manufacturer=TDK, Tolerance=10%, Voltage=25V, Category="Ceramic Capacitors", ComponentLink1Description=LCSC, ComponentLink1URL=https://www.lcsc.com/product-detail/Multilayer-Ceramic-Capacitors-MLCC-SMD-SMT_TDK-C1005X7R1H104KT000F_C361198.html, Item Type=Capacitor, Manufacturer Part Number=C1005X7R1H104KT000F, RoHS=No, Supplier 1=Avnet, Supplier Part Number 1=C1005X7R1H104KT000F
C3 C33 C40: library part CC0402KRX7R9BB472, "CAP CER 4700PF 50V X7R 0402", Case Code (Imperial)=0402, Case Code (Metric)=1005, Dielectric=X7R, LCSC Part Number=C106208, Manufacturer=Yageo, Max Operating Temperature=125°C, Min Operating Temperature=-55°C, Package Quantity=1, Supplier Part Number 1=1989300, Temperature Coefficient=30ppm/°C, Tolerance=10%, Voltage Rating=50V, Capacitance=4.7nF, Case/Package=0402, Category="Ceramic Capacitors", ComponentLink1Description=https://datasheet.ciiva.com/7978/1489800-7978108.pdf?src-supplier=Element14, ComponentLink1URL=https://datasheet.ciiva.com/7978/1489800-7978108.pdf?src-supplier=Element14, ComponentLink2Description=https://datasheet.ciiva.com/176/mlccorderingcode-176364.pdf?src-supplier=Digikey, ComponentLink2URL=https://datasheet.ciiva.com/176/mlccorderingcode-176364.pdf?src-supplier=Digikey, ComponentLink3Description=https://datasheet.ciiva.com/176/mlccorderingcode-176363.pdf?src-supplier=Digikey, ComponentLink3URL=https://datasheet.ciiva.com/176/mlccorderingcode-176363.pdf?src-supplier=Digikey, ComponentLink4Description=https://datasheet.ciiva.com/176/mlccorderingcode-176365.pdf?src-supplier=Digikey, ComponentLink4URL=https://datasheet.ciiva.com/176/mlccorderingcode-176365.pdf?src-supplier=Digikey, ComponentLink5Description=https://datasheet.ciiva.com/11586/upy-gphc-x7r-6-3v-to-50v-8-11586491.pdf?src-supplier=Avnet, ComponentLink5URL=https://datasheet.ciiva.com/11586/upy-gphc-x7r-6-3v-to-50v-8-11586491.pdf?src-supplier=Avnet, Construction=Flat, Depth=0.5mm, Halogen Free=5694HalogenFree, Height=0.5mm, Item Type=Capacitor, Lead Free=5697LeadFree, Length=1mm, Manufacturer Part Number=CC0402KRX7R9BB472, Material=4241ConductorMaterial, Mount="Surface Mount", Number of Pins=2NUMBER, Packaging="Tape and Reel", Pricing 1="10000=0.0021, 40000=0.002, 150000=0.0019, 400000=0.0018, 1000000=0.0017 (USD)", Radiation Hardening=No, Reach SVHC Compliant=No, RoHS=Yes, RoHS Compliant=Yes, Series=CC, Stock 1=1780000, Supplier 1="Future Electronics", Termination=SMD/SMT, Thickness=0.022inch, Voltage Rating (DC)=50V, Width=0.02inch
C4: library part CC1206KKX7RCBB472, "CAP CER 4700PF 1KV X7R 1206", Case Code (Imperial)=1206, Case Code (Metric)=3216, Dielectric=X7R, Dielectric Material=Ceramic, LCSC Part Number=C107198, Manufacturer=Yageo, Max Operating Temperature=125°C, Min Operating Temperature=-55°C, Supplier Part Number 1=7130131, Tolerance=10%, Voltage Rating=1kV, Capacitance=4.7nF, Case/Package=1206, Category="Ceramic Capacitors", ComponentLink1Description=https://datasheet.ciiva.com/13208/upy-gp-np0-16v-to-50v-8-13208693.pdf?src-supplier=Mouser, ComponentLink1URL=https://datasheet.ciiva.com/13208/upy-gp-np0-16v-to-50v-8-13208693.pdf?src-supplier=Mouser, ComponentLink2Description=https://datasheet.ciiva.com/11466/hv-11466701.pdf?src-supplier=Avnet, ComponentLink2URL=https://datasheet.ciiva.com/11466/hv-11466701.pdf?src-supplier=Avnet, Depth=1.6mm, Item Type=Capacitor, Lead Free="Lead Free", Length=3.2mm, Manufacturer Part Number=CC1206KKX7RCBB472, Mount="Surface Mount", Number of Pins=2, Packaging="Tape and Reel", Pricing 1="3000=0.02860, 9000=0.02750, 15000=0.02700, 45000=0.02600, 75000=0.02510 (USD)", Radiation Hardening=No, Resistor Type=Ceramic, RoHS=Yes, RoHS Compliant=Yes, Series=CC, Stock 1=180000, Supplier 1="Future Electronics", Termination=SMD/SMT, Thickness=0.057inch, Voltage Rating (DC)=1kV, Weight=0.000571oz, Width=0.063inch
C5: library part CC1206KKX7RDBB102, "CAP CER 1000PF 2KV X7R 1206", Capacitance=1nF, Case Code (Imperial)=1206, Case Code (Metric)=3216, Dielectric=X7R, Insulation Resistance=10GR, LCSC Part Number=C23631, Manufacturer=Yageo, Max Operating Temperature=125°C, Min Operating Temperature=-55°C, Package Quantity=1, Resistor Type=Ceramic, Supplier Part Number 1=311-1487-1-ND, Tolerance=10%, Voltage=2kV, Case/Package=1206, Category="Ceramic Capacitors", ComponentLink1Description=https://datasheet.ciiva.com/23942/1449957-23942422.pdf?src-supplier=Newark, ComponentLink1URL=https://datasheet.ciiva.com/23942/1449957-23942422.pdf?src-supplier=Newark, ComponentLink2Description=https://datasheet.ciiva.com/186/upy-np0x7r-hv-1kv-to-3kv-4-186736.pdf?src-supplier=Digi-Key, ComponentLink2URL=https://datasheet.ciiva.com/186/upy-np0x7r-hv-1kv-to-3kv-4-186736.pdf?src-supplier=Digi-Key, ComponentLink3Description=https://datasheet.ciiva.com/186/upy-np0x7r-hv-1kv-to-3kv-4-186737.pdf?src-supplier=Digi-Key, ComponentLink3URL=https://datasheet.ciiva.com/186/upy-np0x7r-hv-1kv-to-3kv-4-186737.pdf?src-supplier=Digi-Key, ComponentLink4Description=https://datasheet.ciiva.com/13386/upy-gp-np0-16v-to-50v-8-13386312.pdf?src-supplier=Mouser, ComponentLink4URL=https://datasheet.ciiva.com/13386/upy-gp-np0-16v-to-50v-8-13386312.pdf?src-supplier=Mouser, ComponentLink5Description=https://datasheet.ciiva.com/186/upy-np0x7r-hv-1kv-to-3kv-4-186735.pdf?src-supplier=Digi-Key, ComponentLink5URL=https://datasheet.ciiva.com/186/upy-np0x7r-hv-1kv-to-3kv-4-186735.pdf?src-supplier=Digi-Key, Construction=Flat, Depth=1.6mm, Dissipation Factor=2.5%, Height=1.25mm, Item Type=Capacitor, Lead Free="Lead Free", Length=3.2mm, Manufacturer Part Number=CC1206KKX7RDBB102, Mount="Surface Mount", Number of Pins=2, Packaging="Tape and Reel", Pricing 1="1=0.35000, 10=0.24000, 50=0.16780, 100=0.14390, 500=0.10794, 1000=0.09114 (USD)", Radiation Hardening=No, REACH SVHC=Unknown, RoHS=Yes, RoHS Compliant=Yes, Series=CC, Stock 1=19260, Supplier 1=Digi-Key, Termination=SMD/SMT, Thickness=0.057inch, Voltage Rating=2kV, Voltage Rating (DC)=2kV, Width=0.063inch
C6 C26 C30 C37: library part CL10A106MA8NRNC, "CAP CER 10UF 25V X5R 0603", Case Code (Imperial)=0603, Case Code (Metric)=1608, Dielectric=X5R, LCSC Part Number=C96446, Manufacturer=Samsung, Max Operating Temperature=85°C, Min Operating Temperature=-55°C, Package Quantity=1, Tolerance=20%, Voltage Rating=25V, Capacitance=10uF, Case/Package=0603, Category="Ceramic Capacitors", ComponentLink1Description=https://datasheet.ciiva.com/25766/cl10a106ma8nrnc-25766562.pdf?src-supplier=Digi-Key, ComponentLink1URL=https://datasheet.ciiva.com/25766/cl10a106ma8nrnc-25766562.pdf?src-supplier=Digi-Key, Construction=Flat, Contact Plating=Tin, Lead Free="Lead Free", Length=0.063inch, Manufacturer Part Number=CL10A106MA8NRNC, Mount="Surface Mount", Packaging="Tape and Reel", Pricing 1="4000=0.03753, 8000=0.03700, 16000=0.03595, 24000=0.03515, 32000=0.03383, 40000=0.03304, 400000=0.03225 (USD)", RoHS=Yes, RoHS Compliant=Yes, Series=CL, Supplier 1=Avnet, Supplier Part Number 1=CL10A106MA8NRNC, Termination=Wraparound, Thickness=0.035inch, Width=0.031inch
C7: library part CC0402KRX5R6BB105, "CAP CER 1UF 10V X5R 0402", Case Code (Imperial)=0402, Case Code (Metric)=1005, Dielectric=X5R, LCSC Part Number=C106254, Manufacturer=Yageo, Max Operating Temperature=85°C, Min Operating Temperature=-55°C, Package Quantity=1, Resistor Type=Ceramic, Supplier Part Number 1=603-CC402KRX5R6BB105, Tolerance=10%, Voltage Rating=10V, Capacitance=1uF, Case/Package=0402, Category="Ceramic Capacitors", ComponentLink1Description=https://datasheet.ciiva.com/176/upy-gphc-x5r-4v-to-50v-12-176704.pdf?src-supplier=Digi-Key, ComponentLink1URL=https://datasheet.ciiva.com/176/upy-gphc-x5r-4v-to-50v-12-176704.pdf?src-supplier=Digi-Key, ComponentLink2Description=https://datasheet.ciiva.com/176/mlccorderingcode-176705.pdf?src-supplier=Digi-Key, ComponentLink2URL=https://datasheet.ciiva.com/176/mlccorderingcode-176705.pdf?src-supplier=Digi-Key, ComponentLink3Description=https://datasheet.ciiva.com/176/mlccorderingcode-176706.pdf?src-supplier=Digi-Key, ComponentLink3URL=https://datasheet.ciiva.com/176/mlccorderingcode-176706.pdf?src-supplier=Digi-Key, Construction=Flat, Depth=0.5mm, Dissipation Factor=15%, Halogen Free="Halogen Free", Height=0.5mm, Item Type=Capacitor, Lead Free="Lead Free", Length=1mm, Manufacturer Part Number=CC0402KRX5R6BB105, Mount="Surface Mount", Number of Pins=2, Packaging="Tape and Reel", Pricing 1="1=0.11000, 10=0.05500, 50=0.05500, 100=0.03300, 500=0.02700, 1000=0.02200, 2500=0.02100, 10000=0.01800 (USD)", Radiation Hardening=No, REACH SVHC="No SVHC", RoHS=Yes, RoHS Compliant=Yes, Series=CC, Stock 1=6711367, Supplier 1=Mouser, Termination=SMD/SMT, Thickness=0.022inch, Voltage Rating (DC)=10V, Width=0.02inch
C8 C11 C27: library part CC0402KRX5R8BB105, "CAP CER 1UF 25V X5R 0402", Case Code (Imperial)=0402, Case Code (Metric)=1005, Dielectric=X5R, LCSC Part Number=C326568, Manufacturer=Yageo, Max Operating Temperature=85°C, Min Operating Temperature=-55°C, Package Quantity=10000, Supplier Part Number 1=603-CC402KRX5R8BB105, Tolerance=10%, Voltage Rating=25V, Capacitance=1uF, Case/Package=0402, Category="Ceramic Capacitors", ComponentLink1Description=http://www.mouser.com/ds/2/447/Yageo_UPY-GP_NP0_16V-to-50V_9-358835.pdf?src-supplier=Mouser, ComponentLink1URL=http://www.mouser.com/ds/2/447/Yageo_UPY-GP_NP0_16V-to-50V_9-358835.pdf?src-supplier=Mouser, ComponentLink2Description=http://www.yageo.com/documents/recent/UPY-GPHC_X5R_4V-to-50V_25.pdf?src-supplier=Digi-Key, ComponentLink2URL=http://www.yageo.com/documents/recent/UPY-GPHC_X5R_4V-to-50V_25.pdf?src-supplier=Digi-Key, ComponentLink3Description=https://4donline.ihs.com/images/VipMasterIC/IC/YAGO/YAGO-S-A0006851646/YAGO-S-A0006851646-1.pdf?hkey=6D3A4C79FDBF58556ACFDE234799DDF0&src-supplier=Newark, ComponentLink3URL=https://4donline.ihs.com/images/VipMasterIC/IC/YAGO/YAGO-S-A0006851646/YAGO-S-A0006851646-1.pdf?hkey=6D3A4C79FDBF58556ACFDE234799DDF0&src-supplier=Newark, Halogen Free="Halogen Free", Lead Free="Lead Free", Length=0.039inch, Manufacturer Part Number=CC0402KRX5R8BB105, Mount="Surface Mount", Packaging="Tape and Reel", Pricing 1="1=0.30000, 10=0.20400, 50=0.20400, 100=0.11600, 1000=0.07200, 10000=0.05900 (USD)", RoHS=Yes, RoHS Compliant=Yes, Stock 1=91975, Supplier 1=Mouser, Termination=SMD/SMT, Thickness=0.022inch, Voltage Rating (DC)=25V, Weight=2.3E-05oz, Width=0.02inch
C14 C39: library part GCM1555C1H470FA16D, "CAP CER 47PF 50V C0G/NP0 0402", Case Code (Imperial)=0402, Case Code (Metric)=1005, LCSC Part Number=C393684, Manufacturer=Murata, Max Operating Temperature=125°C, Min Operating Temperature=-55°C, Ratings=AEC-Q200, Supplier Part Number 1=490-16445-1-ND, Tolerance=1%, Voltage Rating=50V, Capacitance=47pF, Case/Package=0402, Category="Ceramic Capacitors", ComponentLink1Description=http://search.murata.co.jp/Ceramy/image/img/A01X/G101/ENG/GCM1555C1H470FA16-01.pdf?src-supplier=Digi-Key, ComponentLink1URL=http://search.murata.co.jp/Ceramy/image/img/A01X/G101/ENG/GCM1555C1H470FA16-01.pdf?src-supplier=Digi-Key, Manufacturer Part Number=GCM1555C1H470FA16D, Mount="Surface Mount", Packaging="Tape and Reel", Pricing 1="1=0.11000, 10=0.07900, 50=0.04500, 100=0.03730, 500=0.02618, 1000=0.02168, 2500=0.02018, 5000=0.01846 (USD)", RoHS=No, Stock 1=27098, Supplier 1=Digi-Key
C15 C16 C17 C18 C19 C25: library part C2012X5R1V226MT000E, "CAP CER 22UF 35V X5R 0805", LCSC Part Number=C338080, Manufacturer="TDK Corporation", Package=0805, ComponentLink1Description=LCSC, ComponentLink1URL=https://www.lcsc.com/product-detail/Multilayer-Ceramic-Capacitors-MLCC-SMD-SMT_TDK-C2012X5R1V226M125AC_C2179409.html, Item Type=Capacitor, Manufacturer Part Number=C2012X5R1V226MT000E
C32: library part CC0402KRX5R7BB105, "CAP CER 1UF 16V X5R 0402", Case Code (Imperial)=0402, Case Code (Metric)=1005, Dielectric=X5R, LCSC Part Number=C325464, Manufacturer=Yageo, Max Operating Temperature=85°C, Min Operating Temperature=-55°C, Supplier Part Number 1=311-1691-6-ND, Tolerance=10%, Voltage Rating=16V, Capacitance=1uF, Case/Package=0402, ComponentLink1Description=http://www.yageo.com/documents/recent/UPY-GPHC_X5R_4V-to-50V_12.pdf?src-supplier=Avnet+Europe, ComponentLink1URL=http://www.yageo.com/documents/recent/UPY-GPHC_X5R_4V-to-50V_12.pdf?src-supplier=Avnet+Europe, Composition=Ceramic, Depth=0.5mm, Halogen Free="Halogen Free", Height=0.5mm, Item Type=Capacitor, Lead Free="Lead Free", Length=1mm, Manufacturer Part Number=CC0402KRX5R7BB105, Mount="Surface Mount", Packaging="Tape and Reel", Pricing 1="1=0.36, 10=0.252, 100=0.1512, 500=0.1134, 1000=0.09576, 2500=0.09072, 5000=0.08568 (USD)", Radiation Hardening=No, Stock 1=1405667, Supplier 1=Digi-Key, Termination=SMD/SMT, Thickness=0.022inch, Voltage Rating (DC)=16V, Weight=2.3E-05oz, Width=0.02inch
C38: library part CC0603JRNPO9BN150, "CAP CER 15PF 50V C0G/NPO 0603", Case Code (Imperial)=0603, Case Code (Metric)=1608, Dielectric=C0G, Dielectric Material=Ceramic, Insulation Resistance=100GR, LCSC Part Number=C107037, Manufacturer=Yageo, Max Operating Temperature=125°C, Min Operating Temperature=-55°C, Package Quantity=1, Supplier Part Number 1=4234670, Tolerance=5%, Voltage Rating=50V, Case/Package=0603, Category="Ceramic Capacitors", ComponentLink1Description=https://datasheet.ciiva.com/144/mlccorderingcode-144635.pdf?src-supplier=Digi-Key, ComponentLink1URL=https://datasheet.ciiva.com/144/mlccorderingcode-144635.pdf?src-supplier=Digi-Key, ComponentLink2Description=https://datasheet.ciiva.com/144/mlccorderingcode-144636.pdf?src-supplier=Digi-Key, ComponentLink2URL=https://datasheet.ciiva.com/144/mlccorderingcode-144636.pdf?src-supplier=Digi-Key, ComponentLink3Description=https://datasheet.ciiva.com/8033/1443161-8033721.pdf?src-supplier=Element14, ComponentLink3URL=https://datasheet.ciiva.com/8033/1443161-8033721.pdf?src-supplier=Element14, ComponentLink4Description=https://datasheet.ciiva.com/28450/1443161-28450472.pdf?src-supplier=Element14, ComponentLink4URL=https://datasheet.ciiva.com/28450/1443161-28450472.pdf?src-supplier=Element14, ComponentLink5Description=https://datasheet.ciiva.com/144/mlccorderingcode-144634.pdf?src-supplier=Digi-Key, ComponentLink5URL=https://datasheet.ciiva.com/144/mlccorderingcode-144634.pdf?src-supplier=Digi-Key, ComponentLink6Description=https://datasheet.ciiva.com/8033/1734582-8033723.pdf?src-supplier=Element14, ComponentLink6URL=https://datasheet.ciiva.com/8033/1734582-8033723.pdf?src-supplier=Element14, ComponentLink7Description=https://datasheet.ciiva.com/8033/1734582-8033722.pdf?src-supplier=Element14, ComponentLink7URL=https://datasheet.ciiva.com/8033/1734582-8033722.pdf?src-supplier=Element14, ComponentLink8Description=https://datasheet.ciiva.com/11464/upy-gp-np0-16v-to-50v-8-11464727.pdf?src-supplier=Avnet, ComponentLink8URL=https://datasheet.ciiva.com/11464/upy-gp-np0-16v-to-50v-8-11464727.pdf?src-supplier=Avnet, Depth=0.8mm, Height=0.8mm, Item Type=Capacitor, Lead Free="Lead Free", Length=1.6mm, Manufacturer Part Number=CC0603JRNPO9BN150, Mounting Technology="Surface Mount", Packaging="Tape and Reel", Pins=2, Pricing 1="4000=0.0038, 16000=0.0036, 80000=0.0034, 160000=0.0033, 500000=0.0031 (USD)", Radiation Hardening=No, Reach SVHC Compliant=No, RoHS=Yes, RoHS Compliant=Yes, Series=CC, Stock 1=832000, Supplier 1="Future Electronics", Termination=SMD/SMT, Thickness=0.035inch, Width=0.031inch
C45: library part CL05A106MP5NUNC, "CAP CER 10UF 10V X5R 0402", Case Code (Imperial)=0402, Case Code (Metric)=1005, Dielectric=X5R, LCSC Part Number=C315248, Manufacturer=Samsung, Max Operating Temperature=85°C, Min Operating Temperature=-55°C, Package Quantity=1, Tolerance=20%, Voltage Rating=10V, Capacitance=10uF, Case/Package=0402, Category="Ceramic Capacitors", ComponentLink1Description=https://datasheet.ciiva.com/25721/cl05a106mp5nunc-25721584.pdf?src-supplier=Digi-Key, ComponentLink1URL=https://datasheet.ciiva.com/25721/cl05a106mp5nunc-25721584.pdf?src-supplier=Digi-Key, ComponentLink2Description=https://datasheet.ciiva.com/26838/getdatasheetpartid-745310-26838170.pdf?src-supplier=Verical, ComponentLink2URL=https://datasheet.ciiva.com/26838/getdatasheetpartid-745310-26838170.pdf?src-supplier=Verical, Construction=Flat, Contact Plating=Tin, Depth=0.5mm, Item Type=Capacitor, Lead Free="Lead Free", Length=1mm, Manufacturer Part Number=CL05A106MP5NUNC, Mount="Surface Mount", Packaging="Tape and Reel", Pricing 1="10000=0.02537 (USD)", Radiation Hardening=No, RoHS=Yes, RoHS Compliant=Yes, Series=CL, Stock 1=1729850, Supplier 1=Avnet, Supplier Part Number 1=CL05A106MP5NUNC, Termination=Wraparound, Thickness=0.028inch, Width=0.02inch
D1: "0.5mA@40V 40V Single 3A 0.55V@3A SMA(DO-214AC) Schottky Barrier Diodes (SBD) ROHS", LCSC Part Number=C8678, Manufacturer=MDD, Package=SMA(DO-214AC), ComponentLink1Description=LCSC, ComponentLink1URL=https://www.lcsc.com/product-detail/Schottky-Barrier-Diodes-SBD_MDD-Microdiode-Electronics-SS34_C8678.html, Item Type=Diode, Manufacturer Part Number=SS34
D2 D3 D6 D7: "TVS DIODE 5VWM 6.3VC DSN0603-2", LCSC Part Number=C477989, Manufacturer=Nexperia, Category="ESD and Circuit Protection ICs", ComponentLink1Description=http://www.farnell.com/datasheets/1961312.pdf?src-supplier=Farnell, ComponentLink1URL=http://www.farnell.com/datasheets/1961312.pdf?src-supplier=Farnell, ComponentLink2Description=https://assets.nexperia.com/documents/data-sheet/PESD5V0H1BSF.pdf?src-supplier=Digi-Key, ComponentLink2URL=https://assets.nexperia.com/documents/data-sheet/PESD5V0H1BSF.pdf?src-supplier=Digi-Key, ComponentLink3Description=http://www.farnell.com/datasheets/1961312.pdf?src-supplier=Newark, ComponentLink3URL=http://www.farnell.com/datasheets/1961312.pdf?src-supplier=Newark, Item Type=Diode, Manufacturer Part Number=PESD5V0H1BSFYL, Pricing 1="18000=0.06453, 36000=0.06278, 54000=0.06104, 90000=0.05930, 180000=0.05755, 900000=0.05581, 1800000=0.05406 (USD)", RoHS=Yes, RoHS Compliant=Yes, Stock 1=9000, Supplier 1=Avnet, Supplier Part Number 1=PESD5V0H1BSFYL
F1: "6V 3A 50A 1W -40℃~+85℃ 6A 3mΩ 5s 30mΩ 0805 Resettable Fuses ROHS", LCSC Part Number=C2757932, Manufacturer=BHFUSE, Package=0805, ComponentLink1Description=LCSC, ComponentLink1URL=https://www.lcsc.com/product-detail/Resettable-Fuses_BHFUSE-BSMD0805L-300_C2757932.html, Item Type=Fuse, Manufacturer Part Number=BSMD0805L-300
FB1 FB2: library part BLM31PG121SN1L, "FERRITE BEAD 120 OHM 1206 1LN", Case Code (Imperial)=1206, Case Code (Metric)=3216, Current Rating=3.5A, DC Current=3A, DC Resistance (DCR)=20mR, LCSC Part Number=C85841, Manufacturer=Murata, Max Operating Temperature=125°C, Min Operating Temperature=-55°C, Package Quantity=3000, Tolerance=25%, Case/Package=1206, Category="Ferrite Beads and Chips", ComponentLink1Description=https://datasheet.ciiva.com/19460/1845419-19460234.pdf?src-supplier=Jameco, ComponentLink1URL=https://datasheet.ciiva.com/19460/1845419-19460234.pdf?src-supplier=Jameco, ComponentLink2Description=https://datasheet.ciiva.com/1012/l0132s0193blm31p-1012992.pdf?src-supplier=Digi-Key, ComponentLink2URL=https://datasheet.ciiva.com/1012/l0132s0193blm31p-1012992.pdf?src-supplier=Digi-Key, ComponentLink3Description=https://datasheet.ciiva.com/11799/0900766b811b5866-11799444.pdf?src-supplier=RSComponents, ComponentLink3URL=https://datasheet.ciiva.com/11799/0900766b811b5866-11799444.pdf?src-supplier=RSComponents, ComponentLink4Description=https://datasheet.ciiva.com/3081/l0110s0100blm31p-3081665.pdf?src-supplier=Avnet, ComponentLink4URL=https://datasheet.ciiva.com/3081/l0110s0100blm31p-3081665.pdf?src-supplier=Avnet, ComponentLink5Description=https://datasheet.ciiva.com/41449/001172383-da-01-en-drossel-1206-120r-3-2x1-60mm-3000st-41449554.pdf?src-supplier=Conrad, ComponentLink5URL=https://datasheet.ciiva.com/41449/001172383-da-01-en-drossel-1206-120r-3-2x1-60mm-3000st-41449554.pdf?src-supplier=Conrad, ComponentLink6Description=https://datasheet.ciiva.com/29348/442557-da-01-en-chip-drossel-1206-120r-3000ma-3-2x1-60mm-29348014.pdf?src-supplier=Conrad, ComponentLink6URL=https://datasheet.ciiva.com/29348/442557-da-01-en-chip-drossel-1206-120r-3000ma-3-2x1-60mm-29348014.pdf?src-supplier=Conrad, ComponentLink7Description=https://datasheet.ciiva.com/14122/apblm31p-data-e-14122856.pdf?src-supplier=Distrelec, ComponentLink7URL=https://datasheet.ciiva.com/14122/apblm31p-data-e-14122856.pdf?src-supplier=Distrelec, ComponentLink8Description=https://datasheet.ciiva.com/48436/blm31pg121sn1l-eng-tds-48436731.pdf?src-supplier=Distrelec, ComponentLink8URL=https://datasheet.ciiva.com/48436/blm31pg121sn1l-eng-tds-48436731.pdf?src-supplier=Distrelec, ComponentLink9Description=https://datasheet.ciiva.com/1012/l0110s0100blm31p-1012991.pdf?src-supplier=Digi-Key, ComponentLink9URL=https://datasheet.ciiva.com/1012/l0110s0100blm31p-1012991.pdf?src-supplier=Digi-Key, ComponentLink10Description=https://datasheet.ciiva.com/1012/l0110s0100blm31p-1012993.pdf?src-supplier=Digi-Key, ComponentLink10URL=https://datasheet.ciiva.com/1012/l0110s0100blm31p-1012993.pdf?src-supplier=Digi-Key, ComponentLink11Description=https://datasheet.ciiva.com/3081/l0110s0100blm31p-3081666.pdf?src-supplier=Avnet, ComponentLink11URL=https://datasheet.ciiva.com/3081/l0110s0100blm31p-3081666.pdf?src-supplier=Avnet, ComponentLink12Description=https://datasheet.ciiva.com/16390/l0110s0100blm31p-16390857.pdf?src-supplier=Future+Electronics, ComponentLink12URL=https://datasheet.ciiva.com/16390/l0110s0100blm31p-16390857.pdf?src-supplier=Future+Electronics, ComponentLink13Description=https://datasheet.ciiva.com/18093/getdatasheetpartid-152966-18093084.pdf?src-supplier=Verical, ComponentLink13URL=https://datasheet.ciiva.com/18093/getdatasheetpartid-152966-18093084.pdf?src-supplier=Verical, Contact Plating=Tin,Matte, Core Material=Ferrite, Depth=1.6mm, Frequency=100MHz, Height=1.1mm, Impedance=120R, Item Type="Ferrite Bead", Lead Free="Lead Free", Length=3.2mm, Manufacturer Part Number=BLM31PG121SN1L, Material=Steel,Ferrite, Max Current Rating=3.5A, Max DC Current=3A, Military Standard=Not, Number of Lines=1, Number of Pins=2, Packaging="Tape and Reel", Pricing 1="3000=0.11563, 6000=0.10938, 12000=0.10313, 18000=0.09688, 24000=0.09063, 30000=0.08438, 300000=0.07813 (USD)", Radiation Hardening=No, RoHS=Yes, RoHS Compliant=Yes, Shielding=Unshielded, Stock 1=290640, Supplier 1=Avnet, Supplier Part Number 1=BLM31PG121SN1L, Termination=SMD/SMT, Test Frequency=100MHz, Width=1.6mm
J1: "Jack Modular Connector RJ45 Through Hole, Right Angle Shielded", LCSC Part Number=C2828084, Manufacturer=kinghelm, Package="Through Hole,Right Angle", ComponentLink1Description="LCSC Link", ComponentLink1URL=https://www.lcsc.com/product-detail/C2828084.html?s_z=n_KH-RCHSP32-8P8C-D, Item Type=RJ45, Manufacturer Part Number=KH-RCHSP32-8P8C-D
J2: "USB-C (USB TYPE-C) Receptacle Connector 16 Position Surface Mount, Right Angle", LCSC Part Number=C5368946, Manufacturer=G-Switch, Package=SMD, ComponentLink1Description="LCSC Link", ComponentLink1URL=https://www.lcsc.com/product-detail/C5368946.html?s_z=n_GT-USB-7004B, Item Type=USB-C, Manufacturer Part Number=GT-USB-7004B
J3: "1x2P 1 1.25mm Male pin 2 -40℃~+85℃ Surface Mount SMD,P=1.25mm Wire To Board / Wire To Wire Connector ROHS", LCSC Part Number=C2905009, Manufacturer=DEALON, Package=SMD,P=1.25mm, ComponentLink1Description=LCSC, ComponentLink1URL=https://www.lcsc.com/product-detail/Wire-To-Board-Wire-To-Wire-Connector_DEALON-1-25-2PWB_C2905009.html, Item Type="JST Connector", Manufacturer Part Number=1.25-2PWB
J4: "Clamshell -25℃~+85℃ 18P Bottom Contact Surface Mount 0.5mm SMD,P=0.5mm FFC/FPC Connectors ROHS", LCSC Part Number=C2889974, Manufacturer=XFCN, Package=SMD,P=0.5mm, ComponentLink1Description=LCSC, ComponentLink1URL=https://www.lcsc.com/product-detail/FFC-FPC-Connectors_XFCN-F0502-B-18-15T-R_C2889974.html, Item Type="FPC Connector", Manufacturer Part Number=F0502-B-18-15T-R